# Altium PCB pow_hw_3_V00.01.PcbDoc
Units mil, origin at the board's own origin, x right, y up, seen from the top; angles counter-clockwise.
Board outline 940 x 1005 mil, 2 copper layers (Top Layer, Bottom Layer); 21 components, 10 nets, 53 pads, 36 vias.
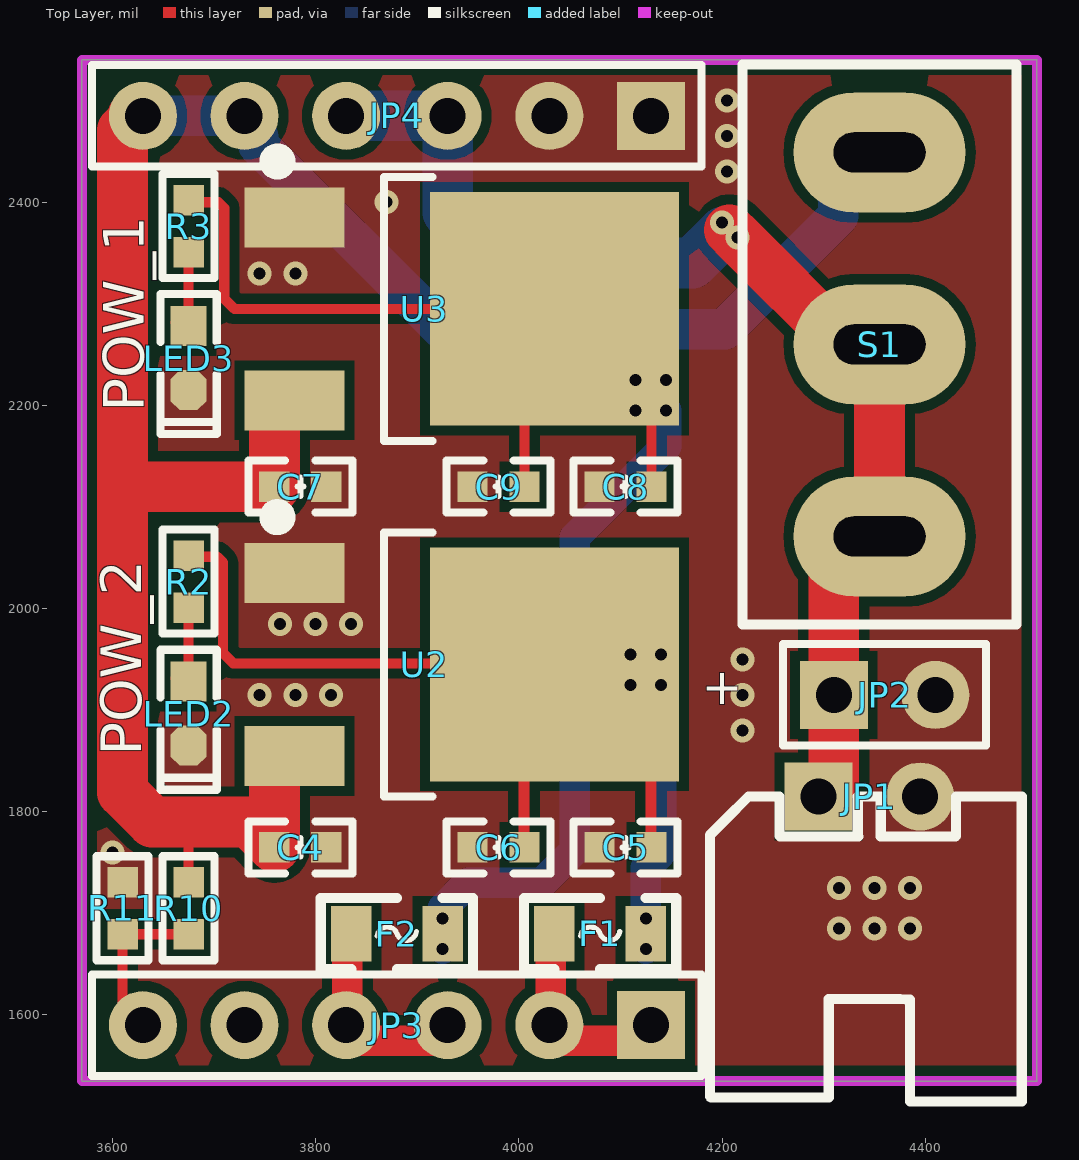
[diagram p0: Top Layer view]
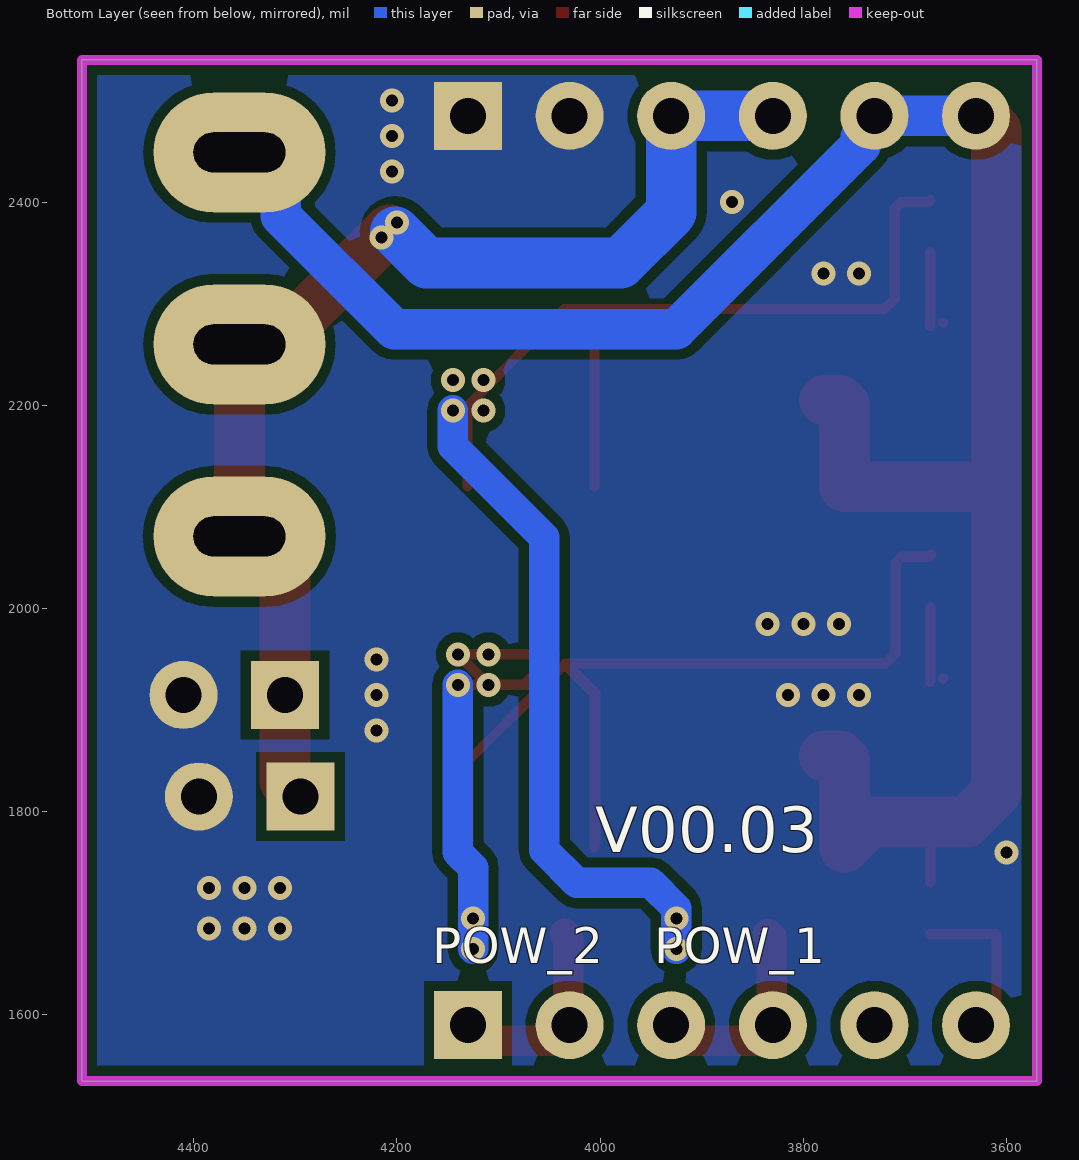
[diagram p1: Bottom Layer view, seen from below]

## Layer stack, top to bottom
Top Solder: solder mask 0.4, Solder Resist, Dk 3.5
Top Layer: signal copper 1.4
Dielectric 1: dielectric 12.6, FR-4, Dk 4.8
Bottom Layer: signal copper 1.4
Bottom Solder: solder mask 0.4, Solder Resist, Dk 3.5

## Board outline
3570,1535 3570,2540 4510,2540 4510,1535

## Design rules (kind name [scope] priority, off if disabled: settings)
Clearance [All] p1: gap=10 ignorepadtopadclearanceinfootprint=FALSE
PlaneConnect [All] p1: planeconnectstyle=Direct reliefexpansion=20 reliefentries=4 reliefconductorwidth=10 reliefairgap=10
PolygonConnect [All] p1: connectstyle=Direct reliefconductorwidth=10 reliefentries=4 polygonreliefangle="90 Angle" airgapwidth=10
RoutingVias [All] p1: holewidth=28 width=50 viastyle="Through Hole" minholewidth=28 minwidth=50 maxholewidth=28 maxwidth=50
SolderMaskExpansion [All] p1: expansion=4 istentingtop=FALSE
SupplyNets "Schematic Supply Nets_3" [InNet('OUT_1')] p1: voltage=0.000
SupplyNets "Schematic Supply Nets_6" [InNet('OUT_2')] p2: voltage=0.000
SupplyNets "Schematic Supply Nets_5" [InNet('GND')] p3: voltage=0.000
SupplyNets "Schematic Supply Nets_2" [InNet('VCC')] p4: voltage=0.000
SupplyNets "Schematic Supply Nets_1" [InNet('VIN')] p5: voltage=0.000
Width [All] p1: maxlimit=100 minlimit=10 preferedwidth=10 minimp=50.000000 maximp=50.000000 favimp=50.000000
29 further rules are at their usual default settings.

## Components (designator, comment, footprint, x,y, rotation, side; value= is the part's Value field where it differs from the comment)
C4 "10uF" "C 0603_L" 3785,1765 r0 top
C5 "100nF" "C 0603_L" 4105,1765 r180 top
C6 "10uF" "C 0603_L" 3980,1765 r180 top
C7 "10uF" "C 0603_L" 3785,2120 r0 top
C8 "100nF" "C 0603_L" 4105,2120 r180 top
C9 "10uF" "C 0603_L" 3980,2120 r180 top
F1 "MSMD200-6V 0.5A" "FU 0805" 4080,1680 r180 top
F2 "MSMD200-6V 0.5A" "FU 0805" 3880,1680 r180 top
JP1 "HDR-1X2" XH2.54-WI-2P 4345,1815 r0 top
JP2 "HDR-1X2" HDR2.54-LI-2P 4360,1915 r0 top
JP3 "HDR-1X6" HDR2.54-LI-6P 3880,1590 r180 top
JP4 "HDR-1X6" HDR2.54-LI-6P 3880,2485 r180 top
LED2 "Colour" "LED 0603R" 3675,1896.5 r270 top
LED3 "Colour" "LED 0603R" 3675,2246.5 r270 top
R2 "2K" "R 0603_L" 3675,2026.5 r270 top
R3 "2K" "R 0603_L" 3675,2376.5 r270 top
R10 "2K" "R 0603_L" 3675,1705 r270 top
R11 "2K" "R 0603_L" 3610,1705 r90 top
S1 "SS-12F23" SS-12D10 4355,2260 r90 top locked
U2 "AMS1086CD-5.0" TO252 3887.36,1945 r270 top
U3 "AMS1086CD-3.3" TO252 3887.36,2295 r270 top

## Footprints (in the part's own frame and the unit in brackets; to place one, negate y for a bottom-side part, rotate by r counter-clockwise, add the part's x,y. Pads: shape width x height; smd on the part's side, far side on the other; paste and mask are expansions set on the pad)
"C 0603_L" [mil] "无极性贴片电容"
  rect 30x30 smd: 1(-25.59,0) 2(25.59,0)
  silkscreen extent -51,-26 51,26, body extent -31,-16 31,16, height 32
"FU 0805" [mil] "贴片保险丝"
  rect 40x55 smd: 1(-45,0) 2(45,0)
  silkscreen extent -75,-35 75,35, body extent -39,-24 39,24, height 20
HDR2.54-LI-2P [mm] "排针，2脚"
  rect 1.7x1.7 hole 0.9: 1(-1.27,0)
  round 1.7 hole 0.9: 2(1.27,0)
  silkscreen extent -2.54,-1.27 2.54,1.27, body extent -2.54,-1.27 2.54,1.27, height 8.5
HDR2.54-LI-6P [mm] "排针，6脚"
  rect 1.7x1.7 hole 0.9: 1(-6.35,0)
  round 1.7 hole 0.9: 2(-3.81,0) 3(-1.27,0) 4(1.27,0) 5(3.81,0) 6(6.35,0)
  silkscreen extent -7.62,-1.27 7.62,1.27, body extent -7.62,-1.27 7.62,1.27, height 8.5
"LED 0603R" [mm] "红色0603LED"
  rect 1x0.9 smd: 1(-0.8,0)
  oct 1x0.9 smd: 2(0.8,0)
  silkscreen extent -1.6,-0.7 1.9,0.7, body extent -0.8,-0.4 0.8,0.4, height 0.47
"R 0603_L" [mil] "1/10W贴片电阻"
  rect 30x30 smd: 1(-25.59,0) 2(25.59,0)
  silkscreen extent -51,-26 51,26, body extent -31,-16 32,16, height 16
SS-12D10 [mm] "脚距4.8mm"
  oval 3x4.3 hole 2.3 slot 1 at 0 deg: 1(-4.8,0) 2(0,0) 3(4.8,0)
  silkscreen extent -7,-3.43 7,3.43, body extent -6.71,-3.3 6.71,3.3, height 11.8
TO252 [mm] "252晶体管"
  rect 1.5x2.5 smd: 1(-2.285,-2.75) 3(2.285,-2.75)
  rect 5.842x6.223 smd: 2(0,3.75)
  silkscreen extent -3.88,-3.37 3.3,0.7, body extent -3.25,-3.05 3.25,6.37, height 2.3
XH2.54-WI-2P [mm] "接插件，2P"
  rect 1.7x1.7 hole 0.9: 1(-1.27,0)
  round 1.7 hole 0.9: 2(1.27,0)
  silkscreen extent -3.99,-7.62 3.81,0, body extent -3.77,-7.35 3.77,0.35, height 5.73

## Part data
C4 C5 C6 C7 C8 C9: library part C, "无极性贴片电容", BOM名称=无极性贴片电容, 学习资源=www.ooocke.com, 版权归属=源创客
F1 F2: library part FU, "贴片保险丝", BOM名称=贴片保险丝, 学习资源=www.ooocke.com, 版权归属=源创客
JP1 JP2: library part "Header 2", "2P接插件", BOM名称=2P接插件, 学习资源=www.ooocke.com, 版权归属=源创客
JP3 JP4: library part "Header 6", "6P接插件", BOM名称=6P接插件, 学习资源=www.ooocke.com, 版权归属=源创客
LED2 LED3: library part LED-SMD, "贴片LED", BOM名称=贴片LED, 学习资源=www.ooocke.com, 版权归属=源创客
R2 R3 R10 R11: library part 电阻, "贴片电阻1%精度"
S1: library part SSW-1P, "1路拨动开关", BOM名称=波动开关, 学习资源=www.ooocke.com, 版权归属=源创客
U3: library part AMS1086CD-5.0

## Via types
v1: diameter 23.62, hole 11.81, Top Layer to Bottom Layer, 36 vias

## Nets (pads, with @x,y where several pads share a name; then routed paths per layer and width w, separated by ;. In a path a pad name is that pad's centre, name@x,y a point inside that pad or via, vN(x,y) a via of type N, cw(c..) or ccw(c..) an arc to the next point about the centre after c; other vN are vias at no path point)
ADC_VIN: JP3.6 R10.2 R11.1 | length 210.1
  Top Layer w10: JP3.6@3614.61,1605.39 JP3.6 3620.01,1590 3620.01,1599.12 3610,1609.13 R11.1 R10.2 ; JP3.6@3615,1609.13 3616.67,1607.46 JP3.6@3616.67,1590
GND: C4.2 C5.2 C6.2 C7.2 C8.2 C9.2 JP1.2 JP2.2 JP4.1 JP4.2 LED2.2 LED3.2 R11.2 U2.1 U3.1
  other v1: 4315,1685 4350,1685 4385,1685 4315,1725 4350,1725 4385,1725 3600,1760 4220,1880 3745,1915 3780,1915 3815,1915 4220,1915 4220,1950 3765,1985 3800,1985 3835,1985 3745,2330 3780,2330 3870,2400 4205,2430 4205,2465 4205,2500
NetF1_2: F1.2 JP3.1 JP3.2 | length 225.9
  Top Layer w30: F1.2 4031.28,1676.28 4031.28,1578.52 4027.56,1574.8 JP3.1@4127.56,1574.8
  Bottom Layer w30: JP3.1@4127.56,1574.8 JP3.1@4140,1587.24
NetF2_2: F2.2 JP3.3 JP3.4 | length 208.3
  Top Layer w30: F2.2 3831.28,1676.28 3831.28,1578.52 3827.56,1574.8 JP3.3@3927.56,1574.8
NetLED2_1: LED2.1 R2.2 | length 72.9
  Top Layer w10: LED2.1 R2.2
NetLED3_1: LED3.1 R3.2 | length 72.9
  Top Layer w10: LED3.1 R3.2
OUT_1: C8.1 C9.1 F2.1 R3.1 U3.2 | length 1522.1
  Top Layer w10: R3.1 3677.09,2400 3704.14,2400 3710,2394.14 3710,2305 3720,2295 U3.2 ; C9.1 4005.59,2265.59 U3.2 ; C8.1 4130.59,2199.41 U3.2
  Bottom Layer w30: v1(3925,1665) 3925,1705 3950,1730 4022.76,1730 4055,1762.24 4055,2070 4145,2160 v1(4145,2195)
  other v1: 3925,1695 4115,2195 4115,2225 4145,2225
OUT_2: C5.1 C6.1 F1.1 R2.1 U2.2 | length 1772.9
  Top Layer w10: R2.1@3673.95,2053.13 3676.04,2051.04 3703.1,2051.04 3708.95,2045.19 3708.95,1956.04 3718.95,1946.04 U2.2@4033.95,1946.04 ; C6.1@4004.55,1771.05 4004.55,1916.64 U2.2@4033.95,1946.04 ; C6.1 4005.59,1915.59 U2.2 ; C5.1@4129.55,1771.05 4129.55,1850.45 U2.2@4055,1925 ; C5.1 4130.59,1849.41 U2.2@4055,1925 ; v1(4140,1925) v1(4110,1925) ; U2.2@4033.95,1946.04 U2.2 ; U2.2 U2.2@4055,1925 ; U2.2@4055,1925 U2.2@4075,1925 ; U2.2@4075,1925 4045,1955 v1(4110,1955) v1(4140,1955) v1(4110,1925) ; U2.2@4075,1925 v1(4110,1925)
  Bottom Layer w30: v1(4125,1665) 4125,1745 4140,1760 v1(4140,1925)
  other v1: 4125,1695
VCC: C4.1 C7.1 JP4.5 JP4.6 R10.1 S1.3 U2.3 U3.3 | length 2167.1
  Top Layer w10: R10.1 3675,1780 3680,1785
  Top Layer w50: JP4.6@3620,2485.01 3620,2480.42 3610,2470.42 3610,2125 ; U2.3 3763.93,1855.04 3759.41,1850.51 C4.1 3734.4,1790 3639.29,1790 3610,1819.29 3610,2125 ; U3.3 3763.93,2205.04 3759.41,2200.51 C7.1 3615,2120 3610,2125
  Bottom Layer w40: JP4.6 JP4.5 3730,2477.71 3743.46,2464.25 3743.46,2456.54 3925,2275 4202.78,2275 4314.46,2386.68 4314.46,2412.89 4350.55,2448.98 S1.3
VIN: JP1.1 JP2.1 JP4.3 JP4.4 S1.1 S1.2 | length 1175.2
  Top Layer w50: v1@4207.5,2372.5 v1(4215,2365) 4320,2260 S1.2 S1.1 4347.84,2071.02 4310,2033.18 JP2.1 4310,1830 JP1.1 JP1.1@4290,1810
  Bottom Layer w50: JP4.4 JP4.3 3930,2390 3980,2340 4170.71,2340 v1@4201.53,2370.82
  other v1: 4200,2380
pads on no net: JP3.5

## Polygon pours and split planes (outlines as drawn)
GND on Top Layer "GND_L01_P000" (solid, pour order 0): 3570,1535 3570,2540 4510,2540 4510,1535
GND on Bottom Layer "GND_L02_P001" (solid, pour order 1): 3570,1535 3570,2540 4510,2540 4510,1535

## Keep-outs
Keep-Out Layer:
  the board outline again, w10

## Silkscreen, mask and mechanical layers (free items; w line width, h text height)
Top Overlay:
  text "POW_1" at 3630.59,2193.5 h40 r90
  text "+" at 4180,1893.8 h60
  text "POW_2" at 3628.34,1855 h40 r90
Bottom Overlay:
  text "V00.03" at 4005,1760 h45
  text "POW_1" at 3946.67,1650.83 h35
  text "POW_2" at 4165,1650.83 h35